# EAGLE board MotorDriver (EAGLE 6.6.0)
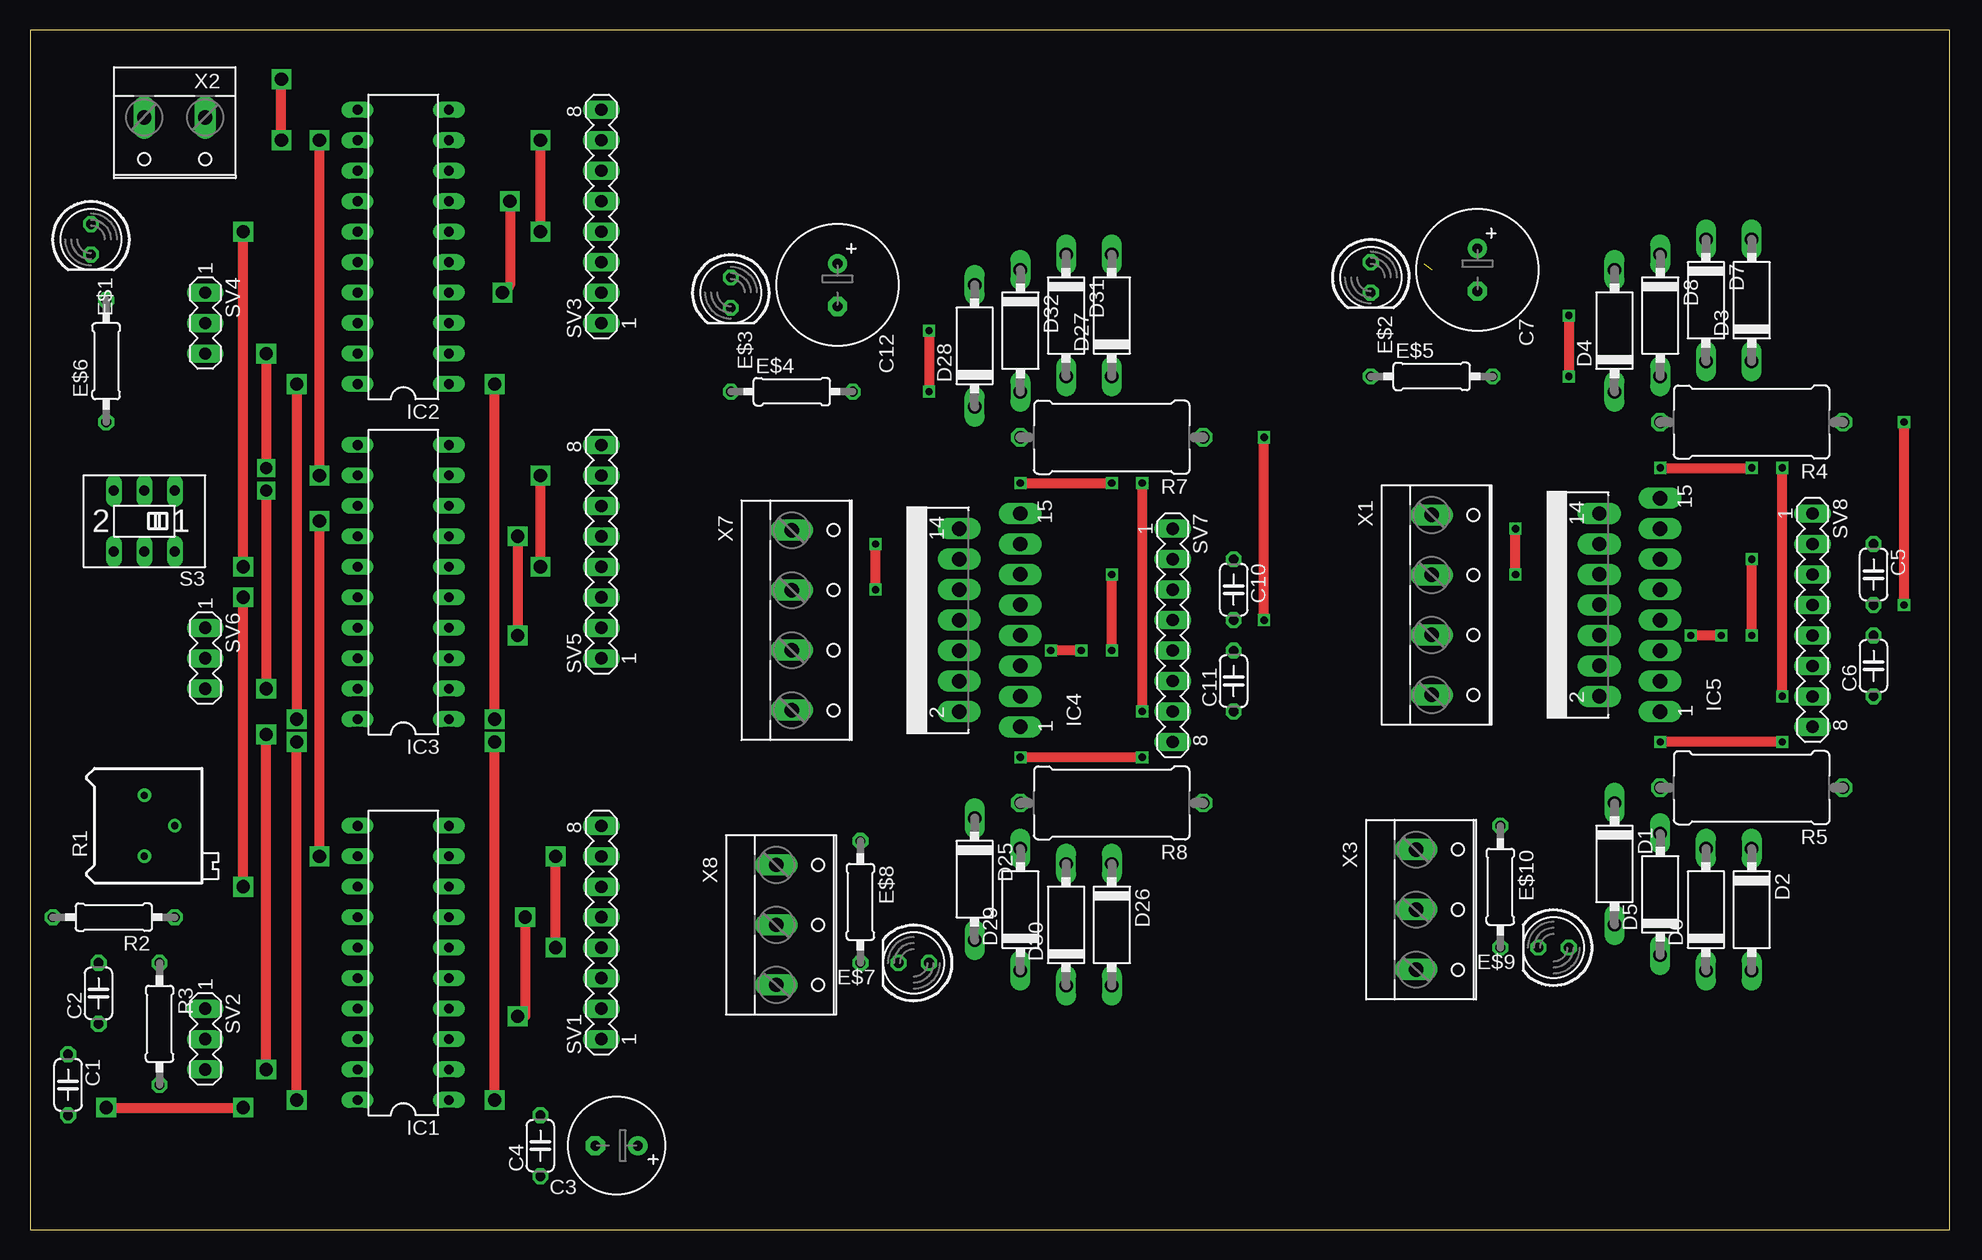
[diagram p0: board, top side]
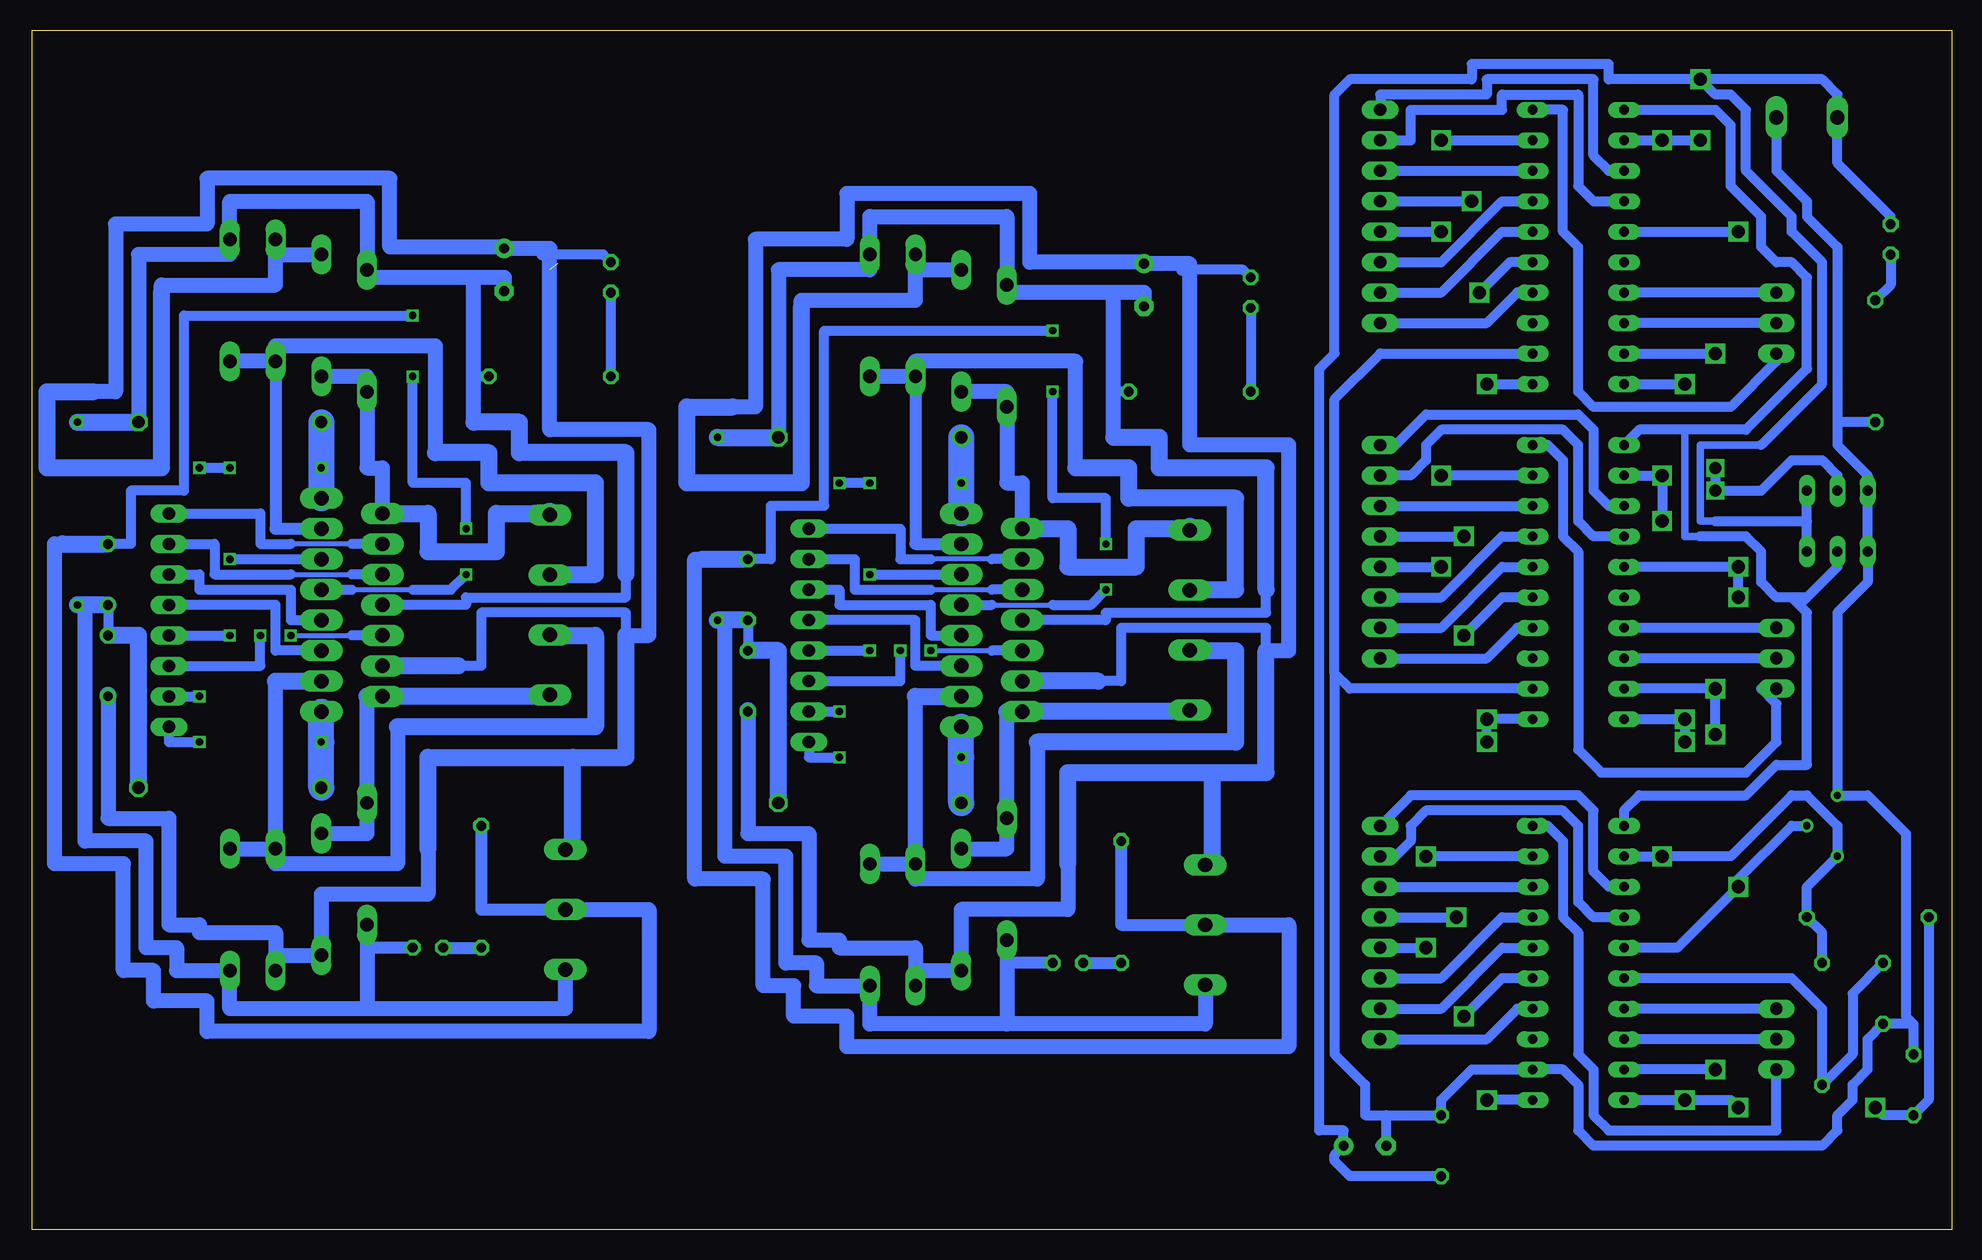
[diagram p1: board, bottom side, seen from below]

Size 160 x 100 mm. Coordinates in mm from the lower left corner, seen from the top.
Outline: 0,0 160,0 160,100 0,100 0,0
Copper layers (1*16): Top 0.035mm / dielectric 1.5mm / Bottom 0.035mm
Design rules "default *": minimum track width 10mil, minimum drill 24mil, track to track 8mil, track to pad 8mil, pad to pad 8mil, via to via 8mil, smd to smd 8mil, copper to edge 40mil, drill to drill 8mil, minimum pad ring 10mil, minimum via ring 8mil, stop-mask expansion 4mil, vias tented up to drill 0mil, thermal gap 10mil

## Footprints (pad centres in the part's own frame; a part is rotated, then mirrored left to right if it is on the bottom)
C050-024X044 = drill 0.813 octagon: 1 -2.54,0; 2 2.54,0
E3,5-8 = drill 0.813 pad 1.6: + -1.778,0 | drill 0.813 pad 1.6 octagon: - 1.778,0
E3,5-10 = drill 0.813 pad 1.6: + -1.778,0 | drill 0.813 pad 1.6 octagon: - 1.778,0
P1-10 = drill 1.118 long: A 5.08,0; C -5.08,0
LED5MM = drill 0.813 octagon: A -1.27,0; K 1.27,0
0207/10 = drill 0.813 octagon: 1 -5.08,0; 2 5.08,0
DIL20 = drill 0.813 long: 1 -11.43,-3.81; 2 -8.89,-3.81; 3 -6.35,-3.81; 4 -3.81,-3.81; 5 -1.27,-3.81; 6 1.27,-3.81; 7 3.81,-3.81; 8 6.35,-3.81; 9 8.89,-3.81; 10 11.43,-3.81; 11 11.43,3.81; 12 8.89,3.81; 13 6.35,3.81; 14 3.81,3.81; 15 1.27,3.81; 16 -1.27,3.81; 17 -3.81,3.81; 18 -6.35,3.81; 19 -8.89,3.81; 20 -11.43,3.81
MULTIWATT-15 = drill 1.2 long: 1 -8.89,-7.62; 2 -7.62,-2.54; 3 -6.35,-7.62; 4 -5.08,-2.54; 5 -3.81,-7.62; 6 -2.54,-2.54; 7 -1.27,-7.62; 8 0,-2.54; 9 1.27,-7.62; 10 2.54,-2.54; 11 3.81,-7.62; 12 5.08,-2.54; 13 6.35,-7.62; 14 7.62,-2.54; 15 8.89,-7.62
RTRIM64P = drill 0.61: 1 0,-2.54; 2 2.54,0; 3 0,2.54
RDH/15 = drill 1.016 octagon: 1 -7.62,0; 2 7.62,0
A68-A31 = drill 0.813 long: 1 -2.54,-2.54; 2 0,-2.54; 3 2.54,-2.54; 4 -2.54,2.54; 5 0,2.54; 6 2.54,2.54
MA08-1 = drill 1.016 long: 1 -8.89,0; 2 -6.35,0; 3 -3.81,0; 4 -1.27,0; 5 1.27,0; 6 3.81,0; 7 6.35,0; 8 8.89,0
MA03-1 = drill 1.016 long: 1 -2.54,0; 2 0,0; 3 2.54,0
W237-4 = drill 1.194 long: 1 -7.5,-1.27; 2 -2.5,-1.27; 3 2.5,-1.27; 4 7.5,-1.27
W237-132 = drill 1.194 long: 1 -2.54,-0.635; 2 2.54,-0.635
W237-103 = drill 1.194 long: 1 -5,-1.29; 2 0,-1.29; 3 5,-1.29

## Placement (x,y rotation side)
C1  [C050-024X044]  3.17,12.06 270 top
C2  [C050-024X044]  5.71,19.68 90 top
C3  [E3,5-8]  48.9,6.99 180 top
C4  [C050-024X044]  42.55,6.99 90 top
C5  [C050-024X044]  153.67,54.61 270 top
C6  [C050-024X044]  153.67,46.99 90 top
C7  [E3,5-10]  120.65,80.01 270 top
C10  [C050-024X044]  100.33,53.34 270 top
C11  [C050-024X044]  100.33,45.72 90 top
C12  [E3,5-10]  67.31,78.74 270 top
D1  BA157  [P1-10]  132.08,30.48 270 top
D2  BA157  [P1-10]  143.51,26.67 270 top
D3  BA157  [P1-10]  143.51,77.47 90 top
D4  BA157  [P1-10]  132.08,74.93 90 top
D5  BA157  [P1-10]  135.89,27.94 90 top
D6  BA157  [P1-10]  139.7,26.67 90 top
D7  BA157  [P1-10]  139.7,77.47 270 top
D8  BA157  [P1-10]  135.89,76.2 270 top
D25  BA157  [P1-10]  78.74,29.21 270 top
D26  BA157  [P1-10]  90.17,25.4 270 top
D27  BA157  [P1-10]  90.17,76.2 90 top
D28  BA157  [P1-10]  78.74,73.66 90 top
D29  BA157  [P1-10]  82.55,26.67 90 top
D30  BA157  [P1-10]  86.36,25.4 90 top
D31  BA157  [P1-10]  86.36,76.2 270 top
D32  BA157  [P1-10]  82.55,74.93 270 top
E$1  [LED5MM]  5.08,82.55 270 top
E$2  [LED5MM]  111.76,79.38 270 top
E$3  [LED5MM]  58.42,78.11 270 top
E$4  [0207/10]  63.5,69.85 0 top
E$5  [0207/10]  116.84,71.12 0 top
E$6  [0207/10]  6.35,72.39 90 top
E$7  [LED5MM]  73.66,22.23 180 top
E$8  [0207/10]  69.22,27.3 270 top
E$9  [LED5MM]  127,23.5 180 top
E$10  [0207/10]  122.56,28.57 270 top
IC1  L297  [DIL20]  31.11,22.23 90 top
IC2  L297  [DIL20]  31.11,81.92 90 top
IC3  L297  [DIL20]  31.11,53.98 90 top
IC4  L298  [MULTIWATT-15]  74.93,50.8 90 top
IC5  L298  [MULTIWATT-15]  128.27,52.07 90 top
R1  [RTRIM64P]  9.53,33.66 0 top
R2  [0207/10]  6.99,26.04 180 top
R3  [0207/10]  10.79,17.14 270 top
R4  [RDH/15]  143.51,67.31 180 top
R5  [RDH/15]  143.51,36.83 180 top
R7  [RDH/15]  90.17,66.04 180 top
R8  [RDH/15]  90.17,35.56 180 top
S3  [A68-A31]  9.53,59.05 180 top
SV1  [MA08-1]  47.62,24.77 90 top
SV2  [MA03-1]  14.61,15.88 270 top
SV3  [MA08-1]  47.62,84.45 90 top
SV4  [MA03-1]  14.61,75.56 270 top
SV5  [MA08-1]  47.62,56.52 90 top
SV6  [MA03-1]  14.61,47.62 270 top
SV7  [MA08-1]  95.25,49.53 270 top
SV8  [MA08-1]  148.59,50.8 270 top
X1  [W237-4]  118.11,52.07 270 top
X2  [W237-132]  12.06,92.08 180 top
X3  [W237-103]  116.84,26.67 270 top
X7  [W237-4]  64.77,50.8 270 top
X8  [W237-103]  63.5,25.4 270 top

## Library data of the parts
C1-C7 C10-C12 E$4-E$6 E$8 E$10 R1-R5 R7 R8 = rcl
D1-D8 D25-D32 = diode
E$1-E$3 E$7 E$9 = led
IC1-IC3 = st-microelectronics; MPN: L297/1; OC_FARNELL: 1094209; OC_NEWARK: 56P8258
IC4 IC5 = st-microelectronics; MPN: L298N; OC_FARNELL: 1589425; OC_NEWARK: 32M1527
S3 = switch
SV1-SV8 = con-lstb; OC_FARNELL: unknown; OC_NEWARK: unknown
X1 X7 = con-wago-500; OC_FARNELL: unknown; OC_NEWARK: unknown
X2 = con-wago-508; OC_FARNELL: unknown; OC_NEWARK: unknown
X3 X8 = con-wago-500; MPN: 237-103; OC_FARNELL: unknown; OC_NEWARK: 18M7116

## Nets
+5V: C3.+ C4.1 E$1.A IC1.12 IC2.12 IC3.12 R1.1 R2.1 R3.1 S3.1 S3.4 X2.2
GND: C1.1 C2.1 C3.- C4.2 E$6.1 IC1.2 IC2.2 IC3.2 R1.3 S3.3 S3.6 X2.1
GND1: C5.2 C6.2 C7.- D1.A D2.A D3.A D4.A E$5.2 E$9.A IC5.8 R4.1 R5.1 X3.3
GND3: C10.2 C11.2 C12.- D25.A D26.A D27.A D28.A E$4.2 E$7.A IC4.8 R7.1 R8.1 X8.3
N$2: D25.C D29.A IC4.2 X7.4
N$3: C2.2 IC1.16 R3.2
N$4: IC1.4 SV1.1
N$5: IC1.6 SV1.2
N$6: IC1.7 SV1.3
N$7: IC1.9 SV1.4
N$8: IC1.5 SV1.5
N$9: IC1.8 SV1.6
N$10: D26.C D30.A IC4.3 X7.3
N$11: D27.C D31.A IC4.13 X7.2
N$12: IC1.17 SV2.1
N$13: IC1.18 SV2.2
N$14: IC1.10 SV2.3
N$15: D28.C D32.A IC4.14 X7.1
N$16: IC4.12 SV7.1
N$17: IC1.19 IC2.19 IC3.19 S3.2
N$18: IC4.5 SV7.4
N$19: IC4.11 SV7.5
N$20: IC4.6 SV7.6
N$21: D1.C D5.A IC5.2 X1.4
N$22: IC1.3
N$23: D2.C D6.A IC5.3 X1.3
N$24: D3.C D7.A IC5.13 X1.2
N$25: D4.C D8.A IC5.14 X1.1
N$26: IC1.11 IC2.11 IC3.11 S3.5
N$27: IC1.15 IC2.15 IC3.15 R1.2
N$28: IC5.12 SV8.1
N$29: IC5.10 SV8.2
N$30: IC2.4 SV3.1
N$31: IC2.6 SV3.2
N$32: IC2.7 SV3.3
N$33: IC2.9 SV3.4
N$34: IC2.5 SV3.5
N$35: IC2.8 SV3.6
N$36: IC4.10 SV7.2
N$37: IC4.7 SV7.3
N$38: IC2.17 SV4.1
N$39: IC2.18 SV4.2
N$40: IC2.10 SV4.3
N$41: IC5.7 SV8.3
N$42: IC5.5 SV8.4
N$43: IC5.11 SV8.5
N$44: IC5.6 SV8.6
N$45: IC1.1 IC2.1 IC3.1
N$48: C1.2 IC1.20 IC2.20 IC3.20 R2.2
N$50: IC3.4 SV5.1
N$51: IC3.6 SV5.2
N$52: IC3.7 SV5.3
N$53: IC3.9 SV5.4
N$54: IC3.5 SV5.5
N$55: IC3.8 SV5.6
N$58: IC3.17 SV6.1
N$59: IC3.18 SV6.2
N$60: IC3.10 SV6.3
S$1: E$2.K E$5.1
S$2: E$3.K E$4.1
S$3: E$1.K E$6.2
S$4: E$7.K E$8.2
S$5: E$9.K E$10.2
SENSE1: IC5.1 R5.2 SV8.8
SENSE2: IC5.15 R4.2 SV8.7
SENSE7: IC4.1 R8.2 SV7.8
SENSE8: IC4.15 R7.2 SV7.7
SENSEA1: IC1.14 SV1.7
SENSEA2: IC1.13 SV1.8
SENSEB1: IC2.14 SV3.7
SENSEB2: IC2.13 SV3.8
SENSEC1: IC3.14 SV5.7
SENSEC2: IC3.13 SV5.8
VCC1: C5.1 E$10.1 IC5.9 X3.2
VCC3: C10.1 E$8.1 IC4.9 X8.2
VDD1: C6.1 C7.+ D5.C D6.C D7.C D8.C E$2.A IC5.4 X3.1
VDD3: C11.1 C12.+ D29.C D30.C D31.C D32.C E$3.A IC4.4 X8.1

## Tracks (layer width: path | path; a pad name or v marks a point on that pad's centre or on a via)
+5V  (via drill 1.1 pad 0.25)
  Top 0.813: v24.13,31.11 v24.13,59.05 | v24.13,62.87 v24.13,90.81 | v20.95,90.81 v20.95,95.89
  Bottom 0.61: 19.68,59.05 20.95,59.05 20.95,65.41 15.88,65.41
  Bottom 0.813: R3.1 10.79,24.77 R2.1 12.06,28.57 R1.1 9.53,33.66 12.06,36.2 13.34,36.2 18.41,31.11 v24.13,31.11 IC1.12 | IC2.12 v24.13,90.81 v20.95,90.81 | v24.13,59.05 v24.13,62.87 IC3.12 | v20.95,95.89 28.57,95.89 28.57,97.16 40.01,97.16 40.01,95.89 50.16,95.89 51.44,94.61 51.44,73.03 52.7,71.75 52.7,8.26 50.67,8.26 C3.+ 51.44,6.22 51.44,5.71 50.16,4.45 C4.1 | S3.4 12.06,59.05 | 12.06,59.05 S3.1 | v20.95,95.89 19.68,94.61 18.41,94.61 17.14,93.34 17.14,88.27 13.34,84.45 13.34,83.19 10.79,80.64 10.79,70.48 15.88,65.41 | v20.95,95.89 10.79,95.89 9.53,94.61 X2.2 9.53,88.9 5.08,84.45 E$1.A | 19.68,59.05 12.06,59.05
GND
  Bottom 0.813: 3.17,17.14 C2.1 6.99,15.88 6.99,13.34 8.26,12.06 8.26,10.79 9.53,9.53 9.53,8.26 10.79,6.99 29.84,6.99 31.11,8.26 31.11,12.06 32.38,13.34 IC1.2 40.01,13.34 42.55,10.79 C4.2 47.12,9.53 | 3.17,17.14 3.81,17.78 3.81,33.02 6.99,36.2 R1.3 9.53,51.44 6.99,53.98 S3.6 S3.3 6.99,62.87 9.53,65.41 9.53,67.31 | 51.44,46.35 51.44,69.22 47.62,73.03 IC2.2 | IC3.2 50.16,45.09 51.44,46.35 | 51.44,46.35 51.44,14.61 48.9,12.06 48.9,9.53 47.12,9.53 | 47.12,9.53 C3.- 47.62,6.99 | X2.1 14.61,88.27 12.06,85.72 12.06,84.45 9.53,81.92 9.53,67.31 | 3.17,17.14 C1.1 | E$6.1 9.53,67.31
GND1  (via drill 0.6)
  Top 0.813: v156.21,52.07 v156.21,67.31
  Bottom 0.813: C5.2 C6.2 | 110.49,54.61 110.49,52.7 123.83,52.7 123.83,52.07 IC5.8 | E$5.2 123.19,71.12
  Bottom 1.016: E$9.A 132.08,23.5 132.08,24.13
  Bottom 1.27: v156.21,52.07 155.57,52.07 155.57,32.38 150.5,32.38 150.5,23.5 147.96,23.5 147.96,21.59 D2.A 143.51,18.41 132.08,18.41 | X3.3 115.55,18.41 132.08,18.41 | D1.A 132.08,24.13 132.08,18.41 | R4.1 151.13,81.28 143.51,81.28 D3.A 143.51,85.72 132.08,85.72 D4.A 132.08,79.38 123.19,79.38 | 123.19,79.38 120.65,79.38 C7.- | 123.19,67.31 123.19,71.12 123.19,79.38
  Bottom 1.422: 110.49,54.61 110.49,64.77 119.38,64.77 119.38,67.31 123.19,67.31 | R5.1 151.13,49.53 C6.2 | C5.2 v156.21,52.07 | v156.21,67.31 R4.1
GND3  (via drill 0.6)
  Top 0.813: v102.87,50.8 v102.87,66.04
  Bottom 0.813: C10.2 C11.2 | 57.15,53.34 57.15,51.44 70.48,51.44 70.48,50.8 IC4.8 | E$4.2 69.85,69.85
  Bottom 1.016: E$7.A 78.74,22.23 78.74,22.86
  Bottom 1.27: v102.87,50.8 102.23,50.8 102.23,31.11 97.16,31.11 97.16,22.23 94.61,22.23 94.61,20.32 D26.A 90.17,17.14 78.74,17.14 | X8.3 62.21,17.14 78.74,17.14 | D25.A 78.74,22.86 78.74,17.14 | R7.1 97.79,80.01 90.17,80.01 D27.A 90.17,84.45 78.74,84.45 D28.A 78.74,78.11 69.85,78.11 | 69.85,78.11 67.31,78.11 C12.- | 69.85,66.04 69.85,69.85 69.85,78.11
  Bottom 1.422: 57.15,53.34 57.15,63.5 66.04,63.5 66.04,66.04 69.85,66.04 | R8.1 97.79,48.26 C11.2 | C10.2 v102.87,50.8 | v102.87,66.04 R7.1
N$2
  Bottom 1.27: D29.A 78.74,31.75 D25.C 78.74,43.18
  Bottom 1.422: X7.4 63.5,43.18 IC4.2 78.74,43.18
N$3
  Bottom 0.813: C2.2 8.26,19.68 8.26,14.61 R3.2 10.79,18.41 13.34,20.95 IC1.16
N$4
  Bottom 0.813: SV1.1 38.73,15.88 36.2,18.41 IC1.4
N$5
  Bottom 0.813: SV1.2 42.55,18.41 37.47,23.5 IC1.6
N$6
  Bottom 0.813: SV1.3 42.55,20.95 37.47,26.04 IC1.7
N$7  (via drill 1.1 pad 0.25)
  Top 0.813: v43.81,23.5 v43.81,31.11
  Bottom 0.813: SV1.4 v43.81,23.5 | IC1.9 v43.81,31.11
N$8  (via drill 1.1 pad 0.25)
  Top 0.813: v41.27,26.04 41.27,17.78 v40.64,17.78
  Bottom 0.813: IC1.5 37.47,20.95 v40.64,17.78 | SV1.5 v41.27,26.04
N$9
  Bottom 0.813: SV1.6 IC1.8
N$10
  Bottom 1.27: D30.A 86.36,44.45 | D26.C D30.A | 76.2,40.64 76.2,29.21 86.36,29.21 D30.A
  Bottom 1.422: 86.36,44.45 IC4.3 | X7.3 63.5,48.26 59.69,48.26 59.69,40.64 76.2,40.64
N$11
  Bottom 1.016: D31.A 86.36,57.15 IC4.13
  Bottom 1.27: D27.C D31.A 86.36,72.39 73.03,72.39 73.03,63.5
  Bottom 1.422: X7.2 63.5,53.34 59.69,53.34 59.69,60.96 68.58,60.96 68.58,63.5 73.03,63.5
N$12
  Bottom 0.813: SV2.1 IC1.17
N$13
  Bottom 0.813: SV2.2 IC1.18
N$14
  Bottom 0.813: IC1.10 33.66,33.66 32.38,32.38 32.38,26.04 31.11,24.77 31.11,14.61 29.84,13.34 29.84,9.53 28.57,8.26 14.61,8.26 SV2.3
N$15
  Bottom 1.27: IC4.14 77.47,62.23 78.74,62.23 D28.C 78.74,69.85 D32.A
  Bottom 1.422: IC4.14 73.66,58.42 73.66,55.24 67.94,55.24 67.94,58.42 64.77,58.42 64.77,58.3 X7.1
  Bottom 1.778: X7.1 63.5,58.42
N$16
  Bottom 0.406: 80.01,55.88 85.09,55.88
  Bottom 0.813: SV7.1 87.63,58.42 87.63,55.88 85.09,55.88 | IC4.12 80.01,55.88
N$17  (via drill 1, 1.1, 1.1 pad 0.25)
  Top 0.813: v19.68,13.34 v19.68,41.27 | v19.68,61.59 v19.68,45.09 | v19.68,73.03 v19.68,63.5
  Bottom 0.813: v19.68,41.27 v19.68,45.09 IC3.19 | v19.68,13.34 IC1.19 | IC2.19 v19.68,73.03 | v19.68,63.5 v19.68,61.59 15.88,61.59 13.34,64.14 10.79,64.14 9.53,62.87 S3.2
N$18
  Bottom 0.813: IC4.5 86.36,46.99 86.36,50.8 SV7.4
N$19  (via drill 0.6)
  Top 0.813: v90.17,48.26 v90.17,54.61
  Bottom 0.813: SV7.5 v90.17,48.26 | v90.17,54.61 IC4.11
N$20  (via drill 0.6)
  Top 0.813: v87.63,48.26 v85.09,48.26
  Bottom 0.406: v85.09,48.26 80.01,48.26
  Bottom 0.813: IC4.6 80.01,48.26 | SV7.6 87.63,45.72 v87.63,48.26
N$21
  Bottom 1.27: D5.A 132.08,33.02 D1.C 132.08,44.45
  Bottom 1.422: X1.4 116.84,44.45 IC5.2 132.08,44.45
N$23
  Bottom 1.27: D6.A 139.7,45.72 | D2.C D6.A | 129.54,41.91 129.54,30.48 139.7,30.48 D6.A
  Bottom 1.422: 139.7,45.72 IC5.3 | X1.3 116.84,49.53 113.03,49.53 113.03,41.91 129.54,41.91
N$24
  Bottom 1.016: D7.A 139.7,58.42 IC5.13
  Bottom 1.27: D3.C D7.A 139.7,73.66 126.36,73.66 126.36,64.77
  Bottom 1.422: X1.2 116.84,54.61 113.03,54.61 113.03,62.23 121.92,62.23 121.92,64.77 126.36,64.77
N$25
  Bottom 1.27: IC5.14 130.81,63.5 132.08,63.5 D4.C 132.08,71.12 D8.A
  Bottom 1.422: IC5.14 127,59.69 127,56.52 121.28,56.52 121.28,59.69 118.11,59.69 118.11,59.57 X1.1
  Bottom 1.778: X1.1 116.84,59.69
N$26
  Bottom 0.61: 22.23,66.67 22.23,57.78 20.95,57.78
  Bottom 0.813: IC1.11 27.3,34.92 26.04,36.2 17.14,36.2 14.61,38.73 12.06,38.73 12.06,51.44 12.7,52.07 | IC2.11 19.68,93.34 18.41,92.08 18.41,87 15.88,84.45 15.88,81.92 14.61,80.64 13.34,80.64 12.06,79.38 12.06,71.75 17.14,66.67 22.23,66.67 26.04,66.67 IC3.11 | 12.7,52.07 13.34,52.7 | 13.34,52.7 14.61,52.7 15.88,53.98 15.88,56.52 17.14,57.78 20.95,57.78 | 12.06,52.7 12.7,52.07 | S3.5 9.53,55.24 12.06,52.7 | 12.06,52.7 13.34,52.7
N$27  (via drill 1.1 pad 0.25)
  Top 0.813: v17.78,28.57 v17.78,52.7 | v17.78,55.24 v17.78,83.19
  Bottom 0.813: IC1.15 22.86,23.5 v17.78,28.57 17.78,29.21 13.34,33.66 R1.2 | v17.78,52.7 v17.78,55.24 IC3.15 | IC2.15 v17.78,83.19
N$28
  Bottom 0.406: 133.35,57.15 138.43,57.15
  Bottom 0.813: SV8.1 140.97,59.69 140.97,57.15 138.43,57.15 | IC5.12 133.35,57.15
N$29
  Bottom 0.406: 138.43,54.61 133.35,54.61
  Bottom 0.813: IC5.10 133.35,54.61 | SV8.2 144.78,57.15 144.78,54.61 138.43,54.61
N$30
  Bottom 0.813: SV3.1 38.73,75.56 36.2,78.11 IC2.4
N$31
  Bottom 0.813: SV3.2 42.55,78.11 37.47,83.19 IC2.6
N$32
  Bottom 0.813: SV3.3 42.55,80.64 37.47,85.72 IC2.7
N$33  (via drill 1.1 pad 0.25)
  Top 0.813: v42.55,83.19 v42.55,90.81
  Bottom 0.813: SV3.4 v42.55,83.19 | v42.55,90.81 IC2.9
N$34  (via drill 1.1 pad 0.25)
  Top 0.813: v40.01,85.72 40.01,78.74 v39.37,78.11
  Bottom 0.813: IC2.5 36.83,80.64 v39.37,78.11 | SV3.5 v40.01,85.72
N$35
  Bottom 0.813: SV3.6 IC2.8
N$36
  Bottom 0.406: 85.09,53.34 80.01,53.34
  Bottom 0.813: IC4.10 80.01,53.34 | SV7.2 91.44,55.88 91.44,53.34 85.09,53.34
N$37
  Bottom 0.813: SV7.3 92.71,53.34 92.71,52.07 85.09,52.07 85.09,49.53 IC4.7
N$38
  Bottom 0.813: SV4.1 IC2.17
N$39
  Bottom 0.813: SV4.2 IC2.18
N$40
  Bottom 0.813: SV4.3 14.61,72.39 18.41,68.58 29.84,68.58 31.11,69.85 31.11,81.92 32.38,83.19 32.38,93.34 IC2.10
N$41
  Bottom 0.813: SV8.3 146.05,54.61 146.05,53.34 138.43,53.34 138.43,50.8 IC5.7
N$42
  Bottom 0.813: IC5.5 139.7,48.26 139.7,52.07 SV8.4
N$43  (via drill 0.6)
  Top 0.813: v143.51,49.53 v143.51,55.88
  Bottom 0.813: SV8.5 v143.51,49.53 | v143.51,55.88 IC5.11
N$44  (via drill 0.6)
  Top 0.813: v140.97,49.53 v138.43,49.53
  Bottom 0.406: v138.43,49.53 133.35,49.53
  Bottom 0.813: IC5.6 133.35,49.53 | SV8.6 140.97,46.99 v140.97,49.53
N$45  (via drill 1.1 pad 0.25)
  Top 0.813: v38.73,10.79 v38.73,40.64 | v38.73,42.55 v38.73,70.48
  Bottom 0.813: IC1.1 v38.73,10.79 | v38.73,40.64 v38.73,42.55 IC3.1 | v38.73,70.48 IC2.1
N$48  (via drill 1.1 pad 0.25)
  Top 0.813: v22.23,10.79 v22.23,40.64 | v22.23,70.48 v22.23,42.55 | v6.35,10.16 v17.78,10.16
  Bottom 0.813: IC1.20 v22.23,10.79 18.41,10.79 v17.78,10.16 | IC3.20 v22.23,42.55 v22.23,40.64 | IC2.20 v22.23,70.48 | R2.2 1.91,10.79 C1.2 5.71,9.53 v6.35,10.16
N$50
  Bottom 0.813: SV5.1 38.73,47.62 36.2,50.16 IC3.4
N$51
  Bottom 0.813: SV5.2 42.55,50.16 37.47,55.24 IC3.6
N$52
  Bottom 0.813: SV5.3 42.55,52.7 37.47,57.78 IC3.7
N$53  (via drill 1.1 pad 0.25)
  Top 0.813: v42.55,55.24 v42.55,62.87
  Bottom 0.813: SV5.4 v42.55,55.24 | IC3.9 v42.55,62.87
N$54  (via drill 1.1 pad 0.25)
  Top 0.813: v40.64,57.78 v40.64,49.53
  Bottom 0.813: IC3.5 37.47,52.7 v40.64,49.53 | SV5.5 v40.64,57.78
N$55
  Bottom 0.813: SV5.6 IC3.8
N$58
  Bottom 0.813: SV6.1 IC3.17
N$59
  Bottom 0.813: SV6.2 IC3.18
N$60
  Bottom 0.813: IC3.10 33.66,65.41 32.38,64.14 32.38,57.78 31.11,56.52 31.11,40.01 29.21,38.1 17.14,38.1 14.61,40.64 14.61,43.81 15.88,45.09 SV6.3
S$1
  Bottom 0.813: E$2.K E$5.1
S$2
  Bottom 0.813: E$3.K E$4.1
S$3
  Bottom 0.813: E$1.K 5.08,78.74 E$6.2
S$4
  Bottom 1.016: E$7.K E$8.2
S$5
  Bottom 1.016: E$9.K E$10.2
S$16  (1 unrouted)
SENSE1  (via drill 0.6)
  Top 0.813: v146.05,40.64 v135.89,40.64
  Bottom 0.813: SV8.8 148.59,40.64 v146.05,40.64
  Bottom 2.184: R5.2 v135.89,40.64 IC5.1
SENSE2  (via drill 0.6)
  Top 0.813: v135.89,63.5 v143.51,63.5 | v146.05,44.45 v146.05,63.5
  Bottom 0.813: v143.51,63.5 v146.05,63.5 | SV8.7 v146.05,44.45
  Bottom 2.184: R4.2 v135.89,63.5 IC5.15
SENSE7  (via drill 0.6)
  Top 0.813: v92.71,39.37 v82.55,39.37
  Bottom 0.813: SV7.8 95.25,39.37 v92.71,39.37
  Bottom 2.184: R8.2 v82.55,39.37 IC4.1
SENSE8  (via drill 0.6)
  Top 0.813: v82.55,62.23 v90.17,62.23 | v92.71,43.18 v92.71,62.23
  Bottom 0.813: v90.17,62.23 v92.71,62.23 | SV7.7 v92.71,43.18
  Bottom 2.184: R7.2 v82.55,62.23 IC4.15
SENSEA1
  Bottom 0.813: IC1.14 29.84,26.04 31.11,27.3 31.11,33.66 32.38,34.92 43.81,34.92 45.09,33.66 45.09,32.38 46.35,31.11 SV1.7
SENSEA2
  Bottom 0.813: IC1.13 28.57,28.57 29.84,29.84 29.84,34.92 31.11,36.2 45.09,36.2 SV1.8
SENSEB1
  Bottom 0.813: IC2.14 29.84,85.72 31.11,87 31.11,94.61 37.47,94.61 37.47,93.34 45.09,93.34 45.09,90.81 SV3.7
SENSEB2
  Bottom 0.813: IC2.13 28.57,88.27 29.84,89.53 29.84,95.89 38.73,95.89 38.73,94.61 47.62,94.61 SV3.8
SENSEC1
  Bottom 0.813: IC3.14 29.84,57.78 31.11,59.05 31.11,65.41 32.38,66.67 42.55,66.67 43.81,65.41 43.81,64.14 45.09,62.87 SV5.7
SENSEC2
  Bottom 0.813: SV5.8 46.35,65.41 43.81,67.94 31.11,67.94 29.84,66.67 29.84,61.59 28.57,60.33 IC3.13
VCC1  (via drill 0.6)
  Top 0.813: v123.83,54.61 v123.83,58.42 | v128.27,76.2 v128.27,71.12
  Bottom 0.406: 133.35,53.34 128.27,53.34
  Bottom 0.813: IC5.9 133.35,53.34 | 128.27,53.34 125.09,53.34 v123.83,54.61 | C5.1 151.76,57.15 151.76,61.59 147.32,61.59 147.32,76.2 v128.27,76.2 | v123.83,58.42 123.83,62.23 128.27,62.23 v128.27,71.12
  Bottom 1.016: E$10.1 122.56,26.67 X3.2
  Bottom 1.27: 157.48,57.15 158.12,57.15 158.12,30.48 152.4,30.48 152.4,21.59 149.86,21.59 149.86,19.05 145.41,19.05 145.41,16.51 108.58,16.51 108.58,26.67 X3.2 115.57,26.67
  Bottom 1.422: 157.48,57.15 C5.1
VCC3  (via drill 0.6)
  Top 0.813: v70.48,53.34 v70.48,57.15 | v74.93,74.93 v74.93,69.85
  Bottom 0.406: 80.01,52.07 74.93,52.07
  Bottom 0.813: IC4.9 80.01,52.07 | 74.93,52.07 71.75,52.07 v70.48,53.34 | C10.1 98.42,55.88 98.42,60.33 93.98,60.33 93.98,74.93 v74.93,74.93 | v70.48,57.15 70.48,60.96 74.93,60.96 v74.93,69.85
  Bottom 1.016: E$8.1 69.22,25.4 X8.2
  Bottom 1.27: 104.14,55.88 104.78,55.88 104.78,29.21 99.06,29.21 99.06,20.32 96.52,20.32 96.52,17.78 92.08,17.78 92.08,15.24 55.24,15.24 55.24,25.4 X8.2 62.23,25.4
  Bottom 1.422: 104.14,55.88 C10.1
VDD1
  Bottom 0.813: 124.46,46.99 122.56,46.99 122.56,51.44 110.49,51.44 110.49,49.53 | E$2.A 112.39,81.28 117.47,81.28
  Bottom 1.016: 116.84,81.79 117.47,81.79 117.47,81.28
  Bottom 1.27: C6.1 153.67,34.29 148.59,34.29 148.59,25.4 146.05,25.4 146.05,24.77 139.7,24.77 D6.C 139.7,22.86 D5.C 135.89,27.94 127,27.94 127,31.75 | D8.C 139.7,81.28 D7.C 139.7,78.74 149.22,78.74 149.22,78.11 | 110.49,49.53 108.58,49.53 108.58,66.67 116.84,66.67 116.84,81.79 C7.+ 120.65,81.92 130.18,81.92 130.18,87.63 145.41,87.63 145.41,83.82 153.03,83.82 153.03,69.85 154.94,69.85
  Bottom 1.422: C6.1 153.67,44.53 | 127,31.75 127,39.37 114.94,39.37 | 114.94,39.37 110.49,39.37 110.49,49.53 | 124.46,46.99 IC5.4 | 149.22,78.11 149.22,63.5 158.75,63.5 158.75,69.85 154.94,69.85 | X3.1 114.94,31.67 114.94,39.37
VDD3
  Bottom 0.813: 71.12,45.72 69.22,45.72 69.22,50.16 57.15,50.16 57.15,48.26 | E$3.A 59.05,80.01 64.14,80.01
  Bottom 1.016: 63.5,80.52 64.14,80.52 64.14,80.01
  Bottom 1.27: C11.1 100.33,33.02 95.25,33.02 95.25,24.13 92.71,24.13 92.71,23.5 86.36,23.5 D30.C 86.36,21.59 D29.C 82.55,26.67 73.66,26.67 73.66,30.48 | D32.C 86.36,80.01 D31.C 86.36,77.47 95.89,77.47 95.89,76.83 | 57.15,48.26 55.24,48.26 55.24,65.41 63.5,65.41 63.5,80.52 C12.+ 67.31,80.64 76.83,80.64 76.83,86.36 92.08,86.36 92.08,82.55 99.69,82.55 99.69,68.58 101.6,68.58
  Bottom 1.422: C11.1 100.33,43.26 | 73.66,30.48 73.66,38.1 61.59,38.1 | 61.59,38.1 57.15,38.1 57.15,48.26 | 71.12,45.72 IC4.4 | 95.89,76.83 95.89,62.23 105.41,62.23 105.41,68.58 101.6,68.58 | X8.1 61.59,30.4 61.59,38.1